# Altium PCB Board_Small_Unit_Altium.pcbdoc
Units mm, origin at the board's own origin, x right, y up, seen from the top; angles counter-clockwise.
Board outline 71.43 x 67.64 mm, 2 copper layers (Top Layer, Bottom Layer); 29 components, 23 nets, 87 pads, 12 vias.
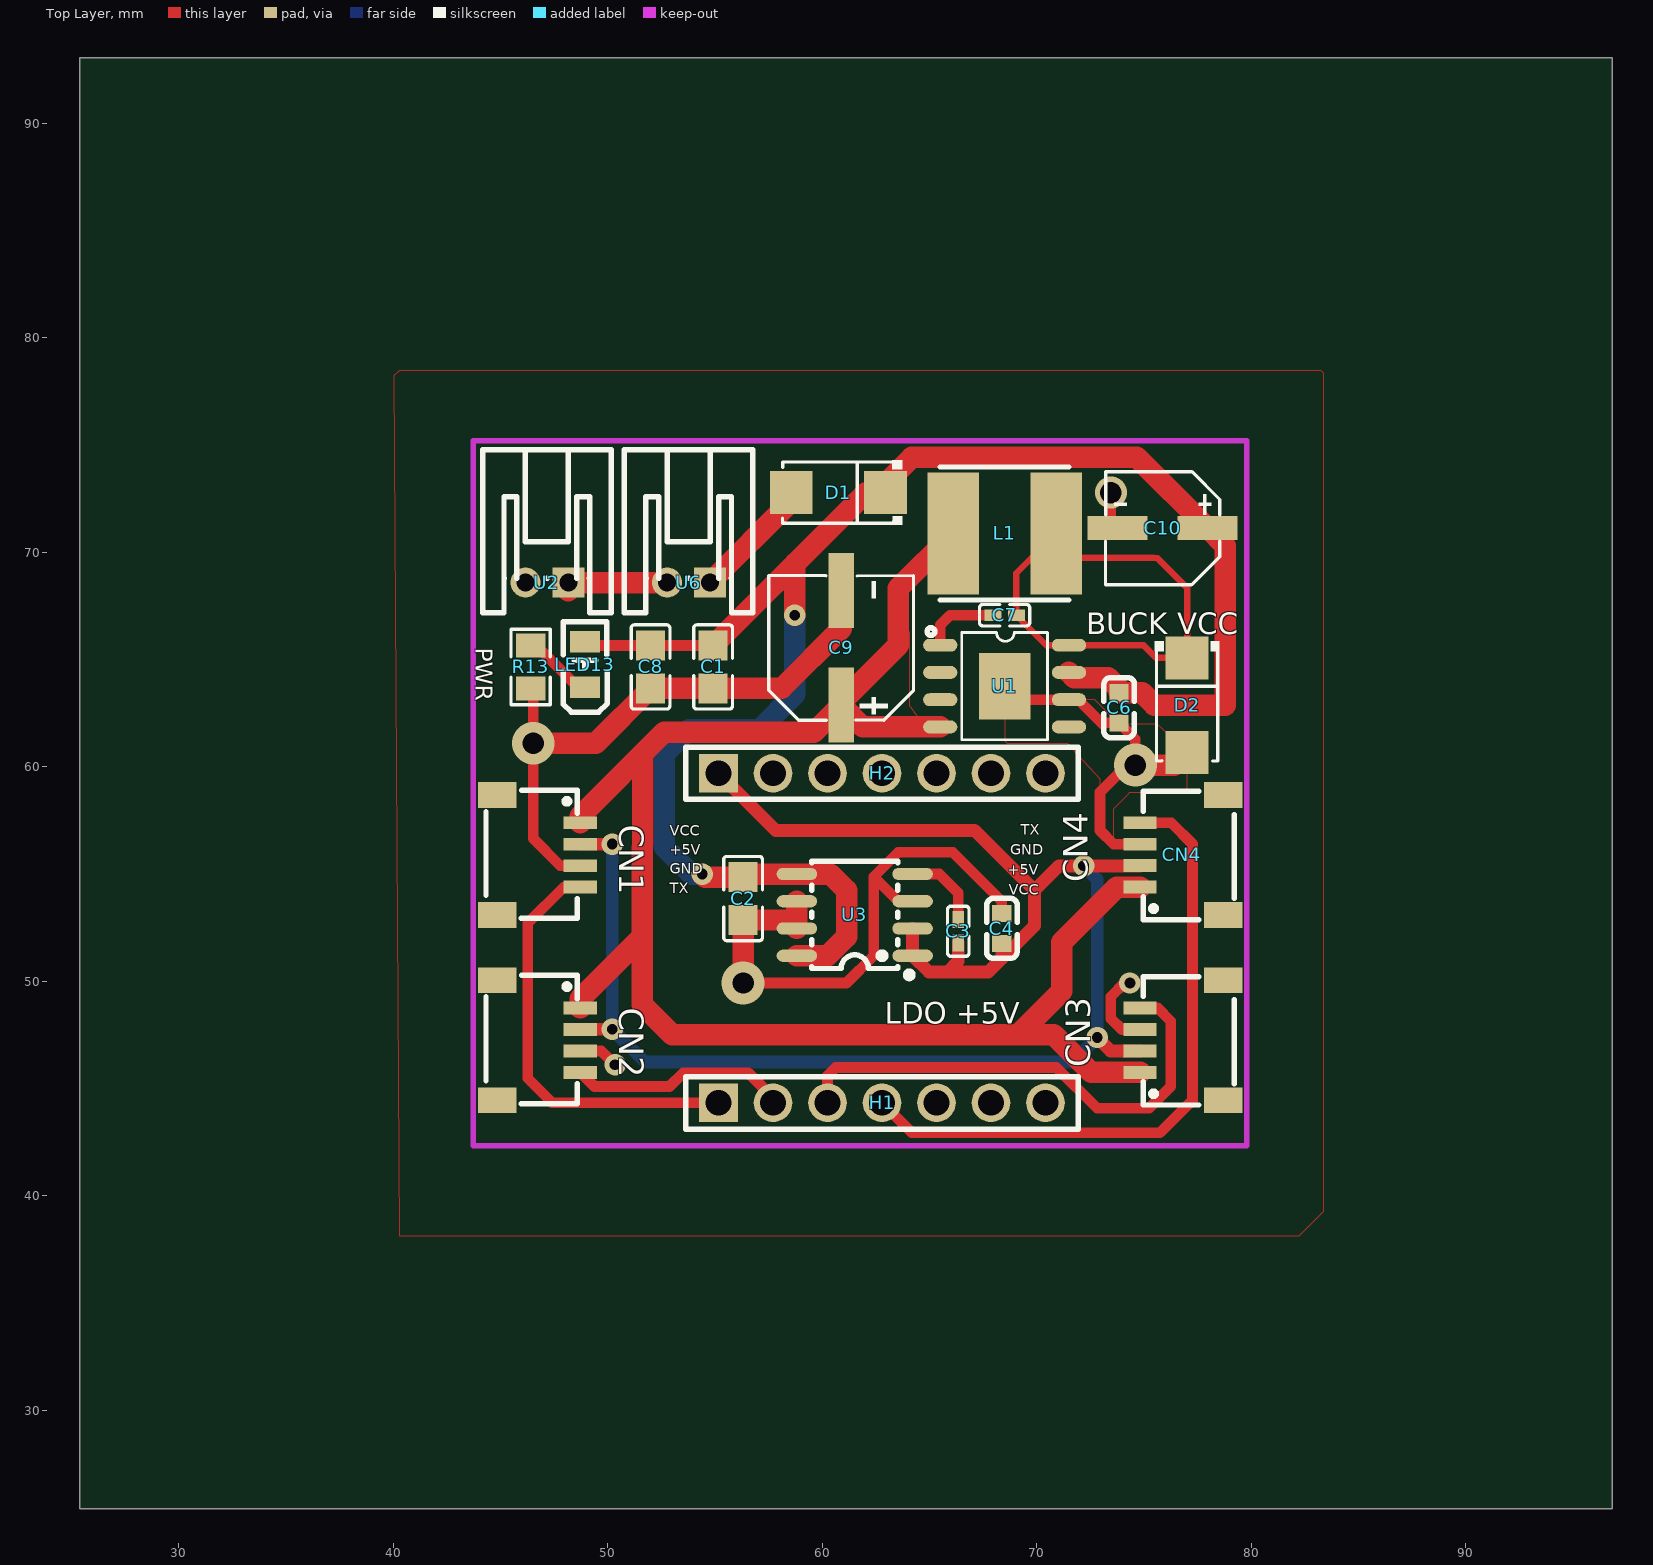
[diagram p0: Top Layer view]
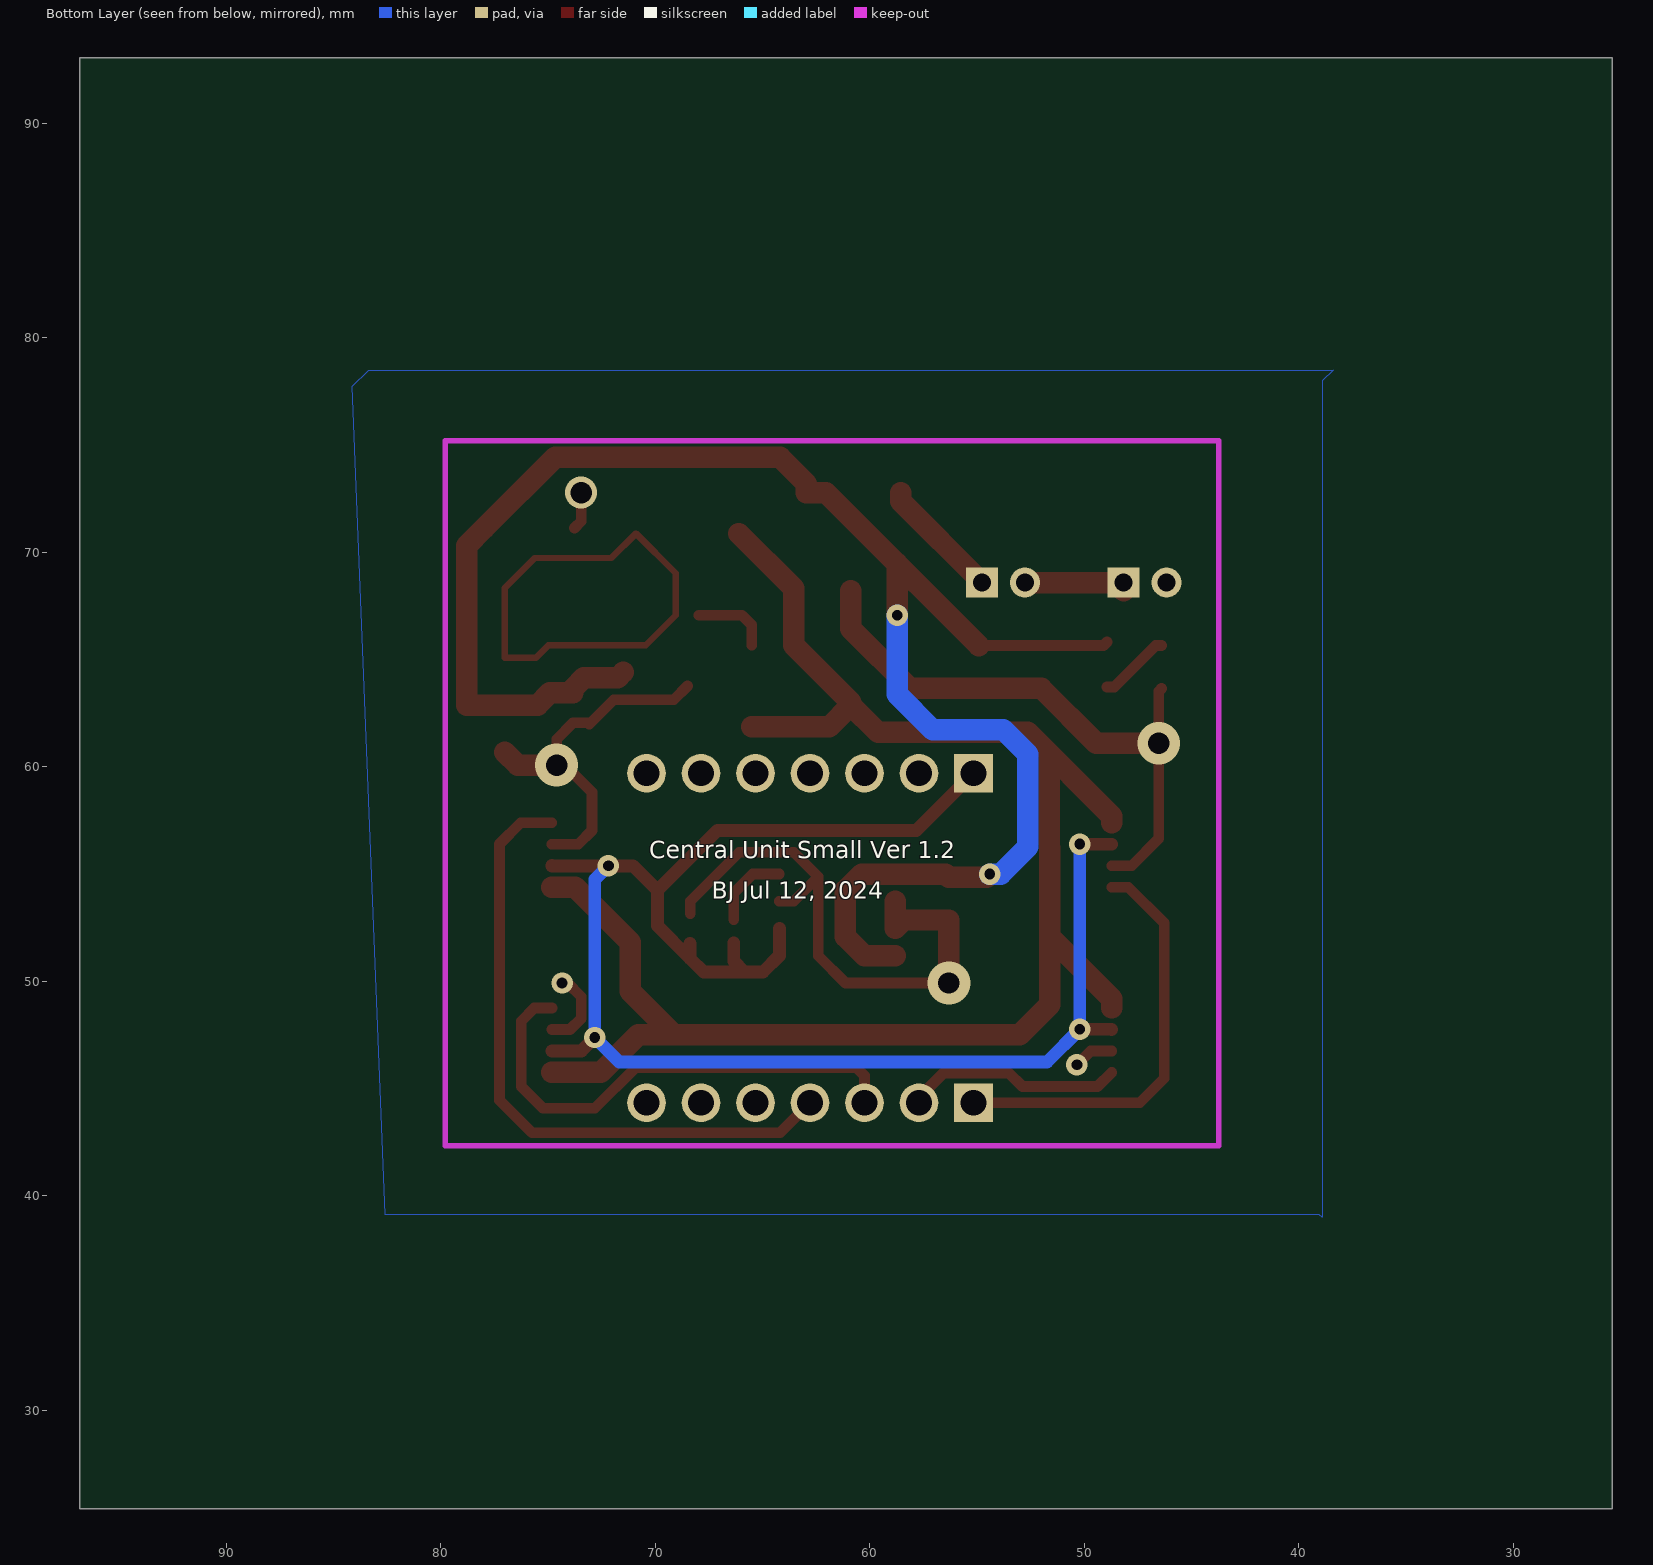
[diagram p1: Bottom Layer view, seen from below]

## Layer stack, top to bottom
Top Layer: signal copper (thickness not stored)
Dielectric: dielectric 0.32, FR-4, Dk 4.8
Bottom Layer: signal copper (thickness not stored)

## Board outline
96.829,25.4 25.4,25.4 25.4,93.038 96.829,93.038

## Components (designator, comment, footprint, x,y, rotation, side; value= is the part's Value field where it differs from the comment)
C1 "1uF" C0805 54.919,64.643 r90 top
C2 "1uF" C0805 56.316,53.848 r90 top
C3 "10nF" C0402 66.349,52.324 r270 top
C4 "10uF" C0603 68.381,52.451 r270 top
C6 "2.2uF" C0603 73.842,62.738 r270 top
C7 "10nF" C0402 68.508,67.056 r180 top
C8 "22uF" C0805 52.001,64.643 r90 top
C9 "120uF" CAP-SMD_BD6.3-L6.6-W6.6-FD 60.888,65.532 r90 top
C10 "22uF" CAP-SMD_BD5.0-L5.3-W5.3-FD 75.874,71.12 r180 top
CN1 "SM04B-SRSS-TB (LF)(SN)" CONN-SMD_4P-P1.00_SM04B-SRSS-TB-LF-SN 46.791,55.88 r270 top
CN2 "SM04B-SRSS-TB (LF)(SN)" CONN-SMD_4P-P1.00_SM04B-SRSS-TB-LF-SN 46.791,47.244 r270 top
CN3 "SM04B-SRSS-TB (LF)(SN)" CONN-SMD_4P-P1.00_SM04B-SRSS-TB-LF-SN 76.763,47.244 r90 top
CN4 "SM04B-SRSS-TB (LF)(SN)" CONN-SMD_4P-P1.00_SM04B-SRSS-TB-LF-SN 76.763,55.88 r90 top
D1 "SS34_C8678" SMA_L4.3-W2.6-LS5.2-RD 60.761,72.771 r180 top
D2 "SS34_C8678" SMA_L4.3-W2.6-LS5.2-RD 77.017,62.865 r270 top
H1 "A2541HWV-7P" HDR-TH_7P-P2.54-V_A2541HWV-7P 62.793,44.323 r0 top
H2 "A2541HWV-7P" HDR-TH_7P-P2.54-V_A2541HWV-7P 62.793,59.69 r0 top
L1 "22uH" IND-SMD_L6.0-W6.0_LVS606045L 68.508,70.866 r180 top
LED13 "SZYY0805YG" LED0805-R-RD_GREEN 48.945,64.759 r90 top
R13 "10kΩ" R0805 46.41,64.643 r90 top
U1 "LM22675MRX-5.0/NOPB" SO-8_L4.9-W3.9-P1.27-LS6.0-BL-EP5.1 68.508,63.754 r270 top
U2 "S2B-PH-K-S(LF)(SN)" CONN-TH_S2B-PH-K-S-LF-SN 47.172,68.58 r0 top
U3 "LT1763CS8-5#TRPBF" SO-8_L4.9-W3.9-P1.27-LS5.9-BL 61.523,53.086 r90 top
U6 "S2B-PH-K-S(LF)(SN)" CONN-TH_S2B-PH-K-S-LF-SN 53.776,68.58 r0 top
? "" ? 61.743,77.672 r0 top
? "" ? 40.949,58.801 r0 top
? "" ? 62.109,57.353 r0 top
? "" ? 50.859,51.833 r0 top
? "" ? 54.033,51.938 r0 top

## Footprints (in the part's own frame and the unit in brackets; to place one, negate y for a bottom-side part, rotate by r counter-clockwise, add the part's x,y. Pads: shape width x height; smd on the part's side, far side on the other; paste and mask are expansions set on the pad)
C0402 [mm]
  rect 0.79x0.54 smd paste-100 mask+0.051: 1(-0.545,0) 2(0.545,0)
  silkscreen extent -1.17,-0.5 1.17,0.5
C0603 [mm]
  rect 0.8x0.9 smd paste+0 mask+0.051: 1(-0.7,0) 2(0.7,0)
  silkscreen extent -1.41,-0.71 1.39,0.72
C0805 [mm]
  rect 1.41x1.35 smd paste-100 mask+0.051: 1(-1,0) 2(1,0)
  silkscreen extent -1.96,-0.9 1.96,0.9
CAP-SMD_BD5.0-L5.3-W5.3-FD [mm]
  rect 2.8x1.1 smd paste+0 mask+0.051: 1(-2.1,0) 2(2.1,0)
  silkscreen extent -2.66,-2.62 2.66,2.65
CAP-SMD_BD6.3-L6.6-W6.6-FD [mm]
  rect 3.5x1.2 smd paste+0 mask+0.051: 1(-2.67,0) 2(2.67,0)
  silkscreen extent -3.38,-3.38 3.38,3.38
CONN-SMD_4P-P1.00_SM04B-SRSS-TB-LF-SN [mm]
  rect 0.6x1.55 smd paste+0 mask+0.051: 1(-1.5,1.938) 2(-0.5,1.938) 3(0.501,1.938) 4(1.5,1.938)
  rect 1.2x1.8 smd paste+0 mask+0.051: 5(2.8,-1.938) 6(-2.8,-1.938)
  silkscreen extent -3.02,-2.46 2.96,1.8
CONN-TH_S2B-PH-K-S-LF-SN [mm]
  rect 1.5x1.4 hole 0.85 paste+0 mask+0.051: 1(1,0)
  round 1.4 hole 0.85 paste+0 mask+0.051: 2(-1,0)
  silkscreen extent -3,-1.4 3,6.2
HDR-TH_7P-P2.54-V_A2541HWV-7P [mm]
  rect 1.8x1.8 hole 1.2 paste+0 mask+0.051: 1(-7.62,0)
  round 1.8 hole 1.2 paste+0 mask+0.051: 2(-5.08,0) 3(-2.54,0) 4(0,0) 5(2.54,0) 6(5.08,0) 7(7.62,0)
  silkscreen extent -9.14,-1.22 9.14,1.22
IND-SMD_L6.0-W6.0_LVS606045L [mm]
  rect 2.4x5.7 smd paste+0 mask+0.051: 1(-2.4,0) 2(2.4,0)
  silkscreen extent -3,-3.1 3,3.1
LED0805-R-RD_GREEN [mm]
  rect 1x1.4 smd paste+0 mask+0.051: 1(1.05,0) 2(-1.05,0)
  silkscreen extent -2.22,-1.04 1.99,1.01
R0805 [mm]
  rect 1.133x1.377 smd paste-100 mask+0.051: 1(-1,0) 2(1,0)
  silkscreen extent -1.76,-0.92 1.76,0.92
SMA_L4.3-W2.6-LS5.2-RD [mm]
  rect 2x2 smd paste+0 mask+0.051: 1(-2.2,0) 2(2.2,0)
  silkscreen extent -2.98,-1.5 2.6,1.5
SO-8_L4.9-W3.9-P1.27-LS5.9-BL [mm]
  oval 0.574x1.888 smd paste+0 mask+0.051: 1(-1.905,-2.699) 2(-0.635,-2.699) 3(0.635,-2.699) 4(1.905,-2.699) 5(1.905,2.699) 6(0.635,2.699) 7(-0.635,2.699) 8(-1.905,2.699)
  silkscreen extent -2.94,-2.69 2.5,2
SO-8_L4.9-W3.9-P1.27-LS6.0-BL-EP5.1 [mm]
  oval 0.6x1.6 smd paste+0 mask+0.051: 1(-1.905,-3) 2(-0.635,-3) 3(0.635,-3) 4(1.905,-3) 5(1.905,3) 6(0.635,3) 7(-0.635,3) 8(-1.905,3)
  rect 3.1x2.4 smd paste+0 mask+0.051: 9(0,0)
  silkscreen extent -2.71,-3.6 2.5,2
? [mm]

## Via types
v1: diameter 1, hole 0.5, Top Layer to Bottom Layer, tented both sides, 8 vias
v2: diameter 2, hole 1, Top Layer to Bottom Layer, tented both sides, 3 vias
v3: diameter 1.5, hole 1, Top Layer to Bottom Layer, tented both sides, 1 vias

## Nets (pads, with @x,y where several pads share a name; then routed paths per layer and width w, separated by ;. In a path a pad name is that pad's centre, name@x,y a point inside that pad or via, vN(x,y) a via of type N, cw(c..) or ccw(c..) an arc to the next point about the centre after c; other vN are vias at no path point)
+5V: C3.2 C4.2 CN1.2 CN2.2 CN3.2 CN4.2 H2.1 U3.1 U3.2 | length 80.3
  Top Layer w0.6: CN2.2 v1(50.22,47.752) ; CN1.2 v1(50.22,56.388) ; H2.1 57.84,57.023 67.111,57.023 69.905,54.229 ; U3.2 U3.1 64.984,50.419 65.841,50.419 ; C3.2 66.349,50.927 65.841,50.419 ; C4.2 68.381,51.054 ; v1(72.826,47.371) 73.453,46.744 CN3.2 ; CN4.2 74.817,55.372 v1(72.191,55.372) 71.048,55.372 69.905,54.229 ; 65.841,50.419 67.746,50.419 68.381,51.054 ; 68.381,51.054 69.905,52.578 69.905,54.229
  Bottom Layer w0.6: v1(50.22,56.388) v1(50.22,47.752) 51.744,46.228 71.683,46.228 v1(72.826,47.371) 72.826,54.737 v1(72.191,55.372)
+7.4V: D1.2 U6.1 | length 5.8
  Top Layer w1: U6.1 58.561,72.365 D1.2
BAT: C1.2 C2.2 C6.1 C8.2 C10.1 D1.1 LED13.1 U1.7 U3.5 U3.8 | length 83
  Top Layer w0.5: LED13.1@48.944,65.809 49.11,65.643 C8.2 C1.2
  Top Layer w1: v1(54.411,54.991) 54.554,54.848 C2.2 56.459,54.991 U3.5 60.38,54.991 61.142,54.229 61.142,52.07 60.253,51.181 U3.8 ; C1.2 57.832,68.556 62.047,72.771 D1.1 62.961,73.193 64.19,74.422 74.672,74.422 77.974,71.12 78.795,70.299 78.795,62.865 75.493,62.865 74.92,63.438 C6.1 73.842,63.627 73.334,64.135 71.762,64.135 U1.7 ; v1(58.729,67.056) 58.729,69.453 58.776,69.5
  Bottom Layer w1: v1(54.411,54.991) 53.903,54.991 52.633,56.261 52.633,56.896 52.633,60.579 53.776,61.722 57.078,61.722 58.729,63.373 v1(58.729,67.056)
ESP_A0: CN1.4 H1.1 | length 19.7
  Top Layer w0.5: CN1.4@48.729,54.379 47.957,54.379 46.283,52.705 46.283,45.466 47.426,44.323 H1.1
ESP_A1: CN2.4 H1.2 | length 10.2
  Top Layer w0.5: CN2.4 49.387,45.085 52.887,45.085 53.522,45.72 56.57,45.72 57.713,44.577 H1.2
ESP_A2: CN3.4 H1.3 | length 23.4
  Top Layer w0.5: H1.3 60.253,45.593 60.634,45.974 70.921,45.974 72.826,44.069 75.239,44.069 76.255,45.085 76.255,48.133 75.643,48.745 CN3.4
ESP_A3: CN4.4 H1.4 | length 30.5
  Top Layer w0.5: H1.4 64.19,42.926 75.747,42.926 77.271,44.45 77.271,56.388 76.279,57.38 CN4.4
ESP_MI: H2.5
ESP_MO: H2.4
ESP_RX: H2.7
ESP_SCK: H2.6
ESP_SCL: H1.6
ESP_SDA: H1.5
ESP_TX: H1.7
GND: C1.1 C2.1 C4.1 C6.2 C8.1 C9.2 C10.2 CN1.3 CN2.3 CN3.3 CN4.3 D2.2 H2.2 R13.1 U1.6 U1.9 U2.2 U3.3 U3.6 U3.7 | length 80.1
  Top Layer w0.5: R13.1 46.537,63.516 v2(46.537,61.087) 46.537,56.642 47.799,55.38 CN1.3 ; CN2.3 49.704,46.744 v1(50.347,46.101) ; v2(56.316,49.911) 61.142,49.911 62.412,51.181 62.412,54.864 ; U3.3 63.555,53.721 62.412,54.864 ; C4.1 68.381,53.721 66.095,56.007 63.555,56.007 62.412,54.864 ; U1.9 69.143,63.119 U1.6 71.937,63.119 73.08,61.976 73.142,62.038 C6.2 74.604,61.276 v2(74.604,60.071) 74.223,60.071 72.953,58.801 72.953,57.023 73.596,56.38 CN4.3 ; v3(73.461,72.771) 73.461,71.433 C10.2 ; v1(74.35,49.911) 74.096,49.911 73.461,49.276 73.461,48.514 73.461,48.26 73.977,47.744 CN3.3
  Top Layer w1: v2(46.537,61.087) 49.445,61.087 C8.1 C1.1 58.11,63.643 60.888,66.421 C9.2 ; v2(56.316,49.911) C2.1 58.427,52.848 U3.7 U3.6 ; v2(74.604,60.071) 76.423,60.071 D2.2
R13_2: LED13.2 R13.2 | length 3.3
  Top Layer w0.5: R13.2 46.679,65.644 48.615,63.708 LED13.2
S$1051: 
S$3274: 
SW: C7.1 D2.1 L1.1 U1.8 | length 23.8
  Top Layer w0.3: C7.1 70.45,65.659 U1.8 74.985,65.659 75.579,65.065 D2.1 77.017,68.326 75.62,69.723 72.051,69.723 L1.1 69.053,69.011 C7.1
U1_1: C7.2 U1.1 | length 3.6
  Top Layer w0.5: U1.1 65.508,66.596 65.968,67.056 C7.2
U3_4: C3.1 U3.4 | length 3.7
  Top Layer w0.5: U3.4 65.46,54.991 66.349,54.102 C3.1
U6_2: U2.1 U6.2 | length 4.8
  Top Layer w1: U2.1@48.172,68.199 48.553,68.58 U6.2
VCC: C9.1 CN1.1 CN2.1 CN3.1 CN4.1 L1.2 U1.4 | length 80.8
  Top Layer w1: CN2.1@48.729,48.745 48.729,49.182 51.617,52.07 ; CN1.1 48.729,57.691 52.633,61.595 59.621,61.595 C9.1 ; 51.63,60.592 51.617,52.07 ; U1.4 61.901,61.849 C9.1 ; L1.2 63.555,68.313 63.555,65.659 60.888,62.992 C9.1 ; 68.725,47.498 69.143,47.498 71.175,49.53 71.175,51.816 73.738,54.379 CN4.1@74.825,54.379 ; CN3.1@74.825,45.743 72.547,45.743 70.794,47.498 53.014,47.498 51.617,48.895 51.617,52.07
pads on no net: CN1.5 CN1.6 CN2.5 CN2.6 CN3.5 CN3.6 CN4.5 CN4.6 H2.3 U1.2 U1.3 U1.5

## Polygon pours and split planes (outlines as drawn)
GND on Bottom Layer (solid): 84.129,77.724 83.367,78.486 38.409,78.486 38.917,77.978 38.917,38.989 39.044,39.116 82.605,39.116
VCC on Top Layer (solid): 64.063,66.04 64.063,62.865 64.444,62.357 64.444,61.849 61.904,61.849 61.777,61.849 60.761,62.865 60.761,62.992 64.063,66.294
SW on Top Layer (solid): 69.016,68.961 69.016,67.056 70.413,65.659 74.985,65.659 75.62,65.024 77.017,65.024 77.017,68.326 75.62,69.723 75.493,69.85 69.905,69.85 69.016,68.961
GND on Top Layer (solid): 73.588,56.388 73.588,58.039 74.223,58.674 74.35,58.801 77.017,58.801 77.017,60.706 75.62,61.976 73.842,61.976 72.699,63.119 71.556,63.119 71.429,63.246 68.508,63.246 68.508,61.214 68.635,61.087 71.429,61.087 72.953,59.436 72.953,59.309 72.953,57.023
VCC on Top Layer (solid): 40.06,78.232 40.314,78.486 83.24,78.486 83.367,78.359 83.367,39.243 82.224,38.1 40.314,38.1

## Silkscreen, mask and mechanical layers (free items; w line width, h text height)
Top Overlay:
  text "BUCK VCC" at 72.318,66.175 h1
  text "PWR" at 43.851,65.532 h0.8 r270
  text "TX" at 69.252,56.815 h0.5
  text "VCC" at 52.887,56.773 h0.5
  text "+5V" at 52.887,55.884 h0.5
  text "GND" at 68.762,55.884 h0.5
  text "GND" at 52.887,54.995 h0.5
  text "+5V" at 68.648,54.953 h0.5
  text "CN4" at 72.382,54.61 h1.14 r90
  text "TX" at 52.887,54.106 h0.5
  text "VCC" at 68.694,54.021 h0.5
  text "LDO +5V" at 62.92,48.014 h1
Bottom Overlay:
  text "Central Unit Small Ver 1.2" at 70.286,55.734 h0.8
  text "BJ Jul 12, 2024" at 67.365,53.829 h0.8
Document:
  lines w0.254 net S$3274: 53.268,60.96 73.08,60.96 73.08,42.926 53.268,42.926 53.268,60.96 ; 53.268,60.96 53.268,60.96